# Altium PCB Back.PcbDoc
Units mm, origin at the board's own origin, x right, y up, seen from the top; angles counter-clockwise.
Board outline 49.6 x 20 mm, 2 copper layers (Top Layer, Bottom Layer), stack 1.57 mm thick; 29 components, 15 nets, 90 pads, 147 vias.
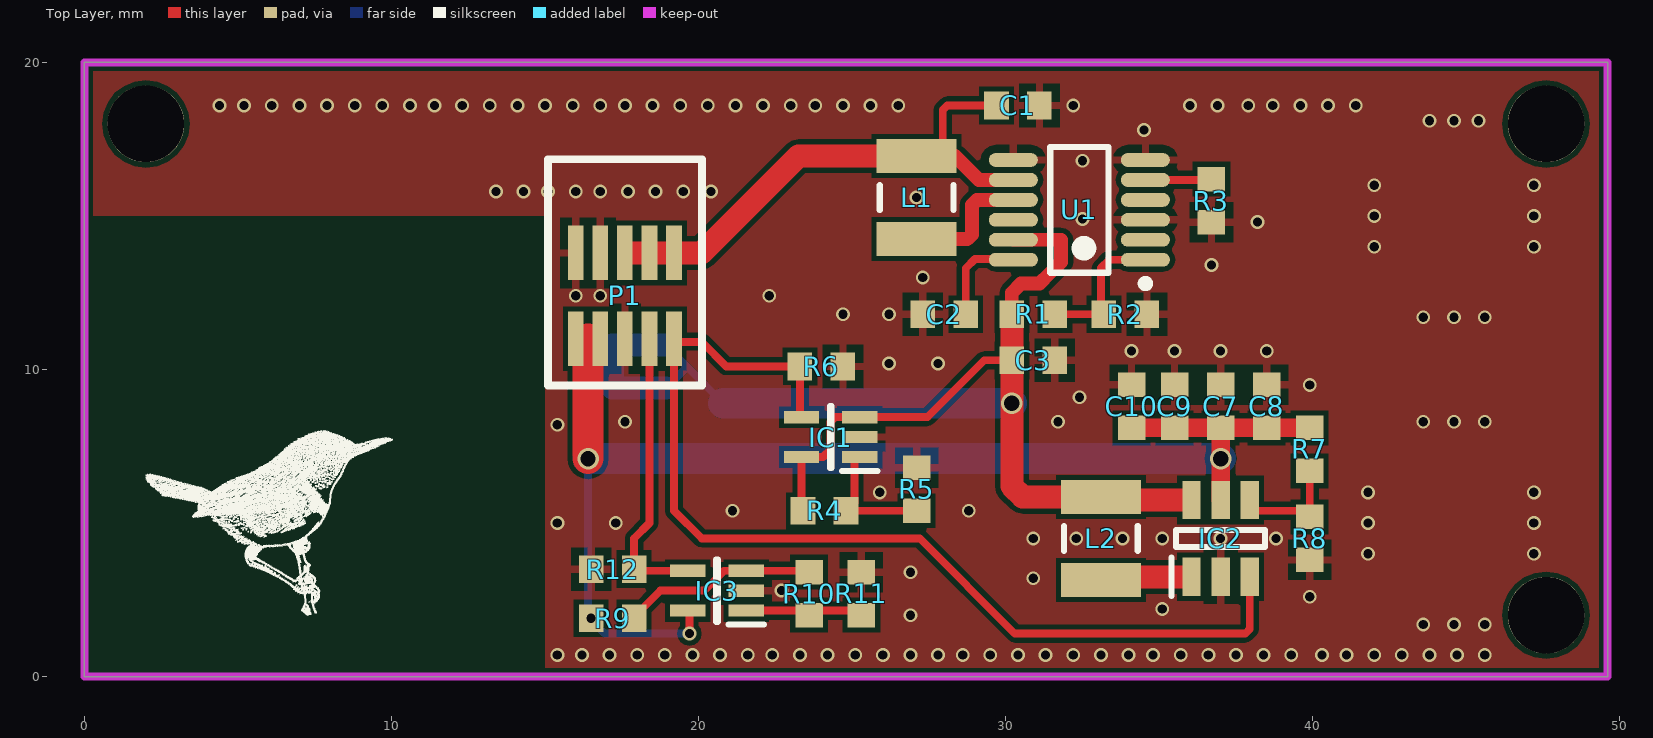
[diagram p0: Top Layer view]
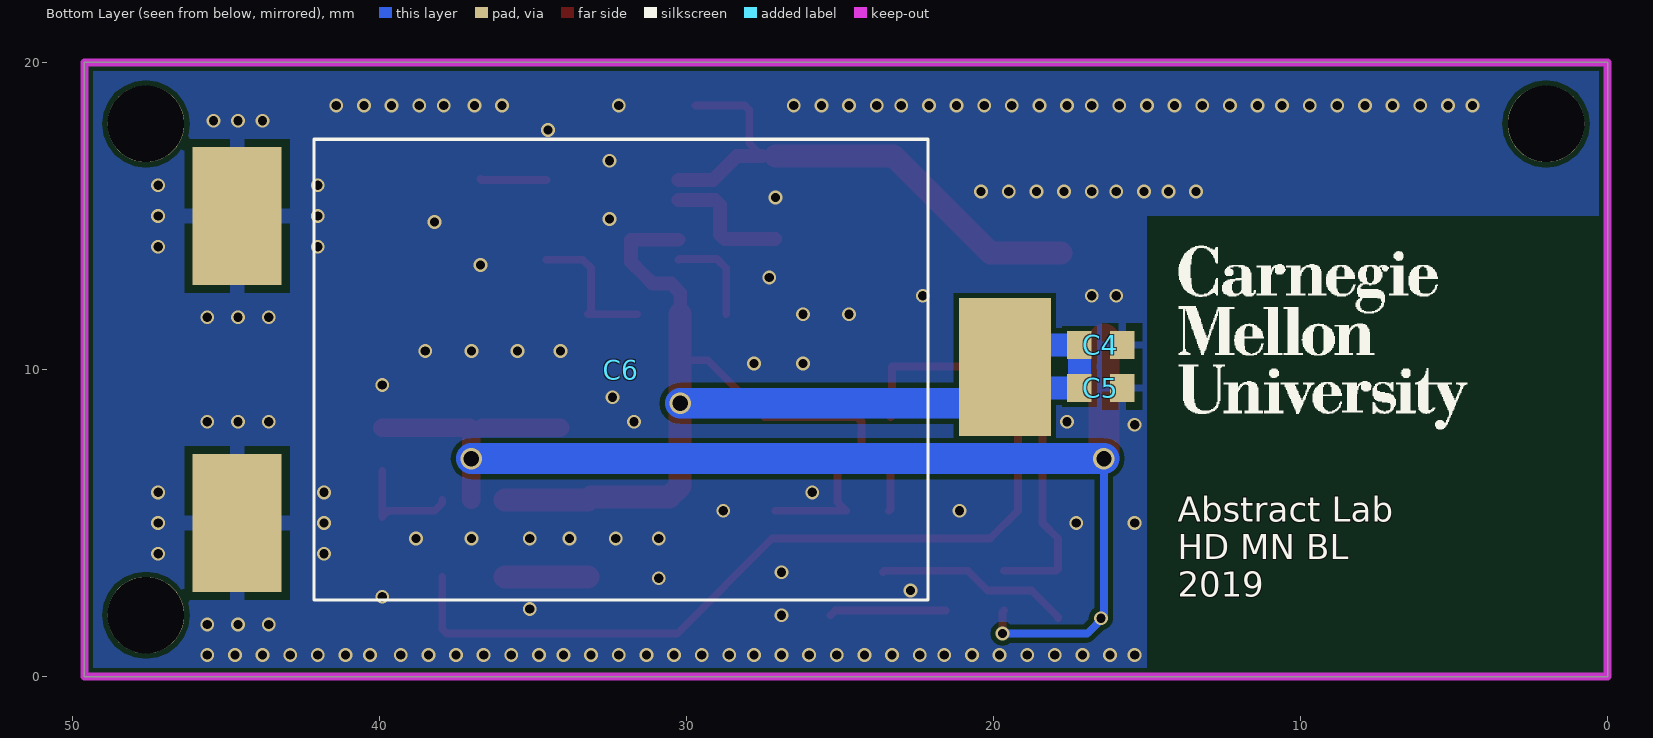
[diagram p1: Bottom Layer view, seen from below]

## Layer stack, top to bottom
Top Solder: solder mask 0.0102, Solder Resist, Dk 3.5
Top Layer: signal copper 0.035
Dielectric 1: dielectric 1.5, FR-4, Dk 3.9
Bottom Layer: signal copper 0.035
Bottom Solder: solder mask 0.0102, Solder Resist, Dk 3.5

## Board outline
0,0 49.6,0 49.6,20 0,20

## Design rules (kind name [scope] priority, off if disabled: settings)
Clearance [All] p1: gap=0.16 ignorepadtopadclearanceinfootprint=FALSE
MinimumSolderMaskSliver [All] p1: minsoldermaskwidth=0.16
PlaneClearance [All] p1: clearance=0.254
PlaneConnect [All] p1: pad.planeconnectstyle=Relief pad.reliefexpansion=0.508 pad.reliefentries=4 pad.reliefconductorwidth=0.254 pad.reliefairgap=0.254 via.planeconnectstyle=Direct via.reliefexpansion=0.508 via.reliefentries=4 via.reliefconductorwidth=0.254 via.reliefairgap=0.254
PolygonConnect [All] p1: thpad.connectstyle=Relief thpad.reliefconductorwidth=0.254 thpad.reliefentries=4 thpad.polygonreliefangle="90 Angle" thpad.airgapwidth=0.254 smdpad.connectstyle=Relief smdpad.reliefconductorwidth=0.254 smdpad.reliefentries=4 smdpad.polygonreliefangle="90 Angle" smdpad.airgapwidth=0.254 via.connectstyle=Direct via.reliefconductorwidth=0.254 via.reliefentries=4 via.polygonreliefangle="90 Angle" via.airgapwidth=0.254
RoutingVias [All] p1: holewidth=0.3 width=0.45 viastyle="Through Hole" minholewidth=0.3 minwidth=0.45 maxholewidth=6.5 maxwidth=5
SolderMaskExpansion [All] p1: expansion=0.102
Width CAM [InNet('Cam*') or InNet('AGND') or InNet('DVDD') or InNet('SCL')or InNet('SDA')] p1: maxlimit=1 minlimit=0.17 preferedwidth=0.2
Width MatchedLine [InNet('ANT') OR InNet('NetANT1_1')] p2: maxlimit=2 minlimit=0.254 preferedwidth=0.99
Width [All] p3: maxlimit=5 minlimit=0.16 preferedwidth=0.254
27 further rules are at their usual default settings.

## Components (designator, comment, footprint, x,y, rotation, side; value= is the part's Value field where it differs from the comment)
C1 "Cap" 1608[0603] 30.4,18.6 r180 top value=10uF
C2 "Cap" 1608[0603] 28,11.8 r0 top value=1uF
C3 "Cap" 1608[0603] 30.9,10.3 r180 top value=10uF
C4 "Cap" 1608[0603] 16.5,10.8 r0 bottom value=0.1uF
C5 "Cap" 1608[0603] 16.5,9.4 r0 bottom value=1uF
C6 "BZ055A333ZSB" BZ054B223ZSB 32.1,10 r180 bottom
C7 "Cap" 1608[0603] 37,8.8 r270 top value=0.1uF
C8 "Cap" 1608[0603] 38.5,8.8 r270 top value=1uF
C9 "Cap" 1608[0603] 35.5,8.8 r270 top value=10uF
C10 "Cap" 1608[0603] 34.1,8.8 r270 top value=10uF
IC1 "MIC841HYC5-TR" SOT65P210X110-5N 24.3,7.8 r180 top
IC2 "TPS61070DDCR" SOT95P280X110-6N 37,4.5 r90 top
IC3 "MIC841HYC5-TR" SOT65P210X110-5N 20.6,2.8 r180 top
L1 "Inductor" C1210 27.1,15.6 r270 top value=10uH
L2 "Inductor" C1210 33.1,4.5 r90 top value=4.7uH
P1 "Header 5X2" FTE-105-03-X-DH 17.6,12.4 r180 top locked
R1 "Res3" 1608[0603] 30.9,11.8 r180 top value=2M
R2 "Res3" 1608[0603] 33.9,11.8 r180 top value=1M
R3 "Res3" 1608[0603] 36.7,15.5 r90 top value=150K
R4 "Res3" 1608[0603] 24.1,5.4 r180 top value=1.74M
R5 "Res3" 1608[0603] 27.1,6.1 r270 top value=1.24M
R6 "Res3" 1608[0603] 24,10.1 r180 top value=2M
R7 "Res3" 1608[0603] 39.9,7.4 r90 top value=1.96M
R8 "Res3" 1608[0603] 39.9,4.5 r90 top value=392K
R9 "Res3" 1608[0603] 17.2,1.9 r180 top value=1.3M
R10 "Res3" 1608[0603] 23.6,2.7 r90 top value=453k
R11 "Res3" 1608[0603] 25.3,2.7 r270 top value=1.24M
R12 "Res3" 1608[0603] 17.2,3.5 r0 top value=2M
U1 "LTC3105EMS#PBF" LT-MS-12_N 32.4,15.2 r180 top

## Footprints (in the part's own frame and the unit in brackets; to place one, negate y for a bottom-side part, rotate by r counter-clockwise, add the part's x,y. Pads: shape width x height; smd on the part's side, far side on the other; paste and mask are expansions set on the pad)
1608[0603] [mm] "Chip Capacitor, Body 1.6x0.8mm, IPC High Density"
  rect 0.8x0.9 smd: 1(-0.7,0) 2(0.7,0)
  body extent -0.87,-0.48 0.87,0.48, height 1.3
BZ054B223ZSB [mm]
  rect 2.9x4.5 smd: 1(-12.525,-5) 2(-12.525,5)
  rect 3x4.5 smd: 3(12.475,0.08)
  silkscreen extent -10.02,-7.5 9.97,7.5, body extent -12.5,-7.5 13.5,7.5, height 3.01
C1210 [mm] "Chip Capacitor, Body 3.2x2.5mm, IPC High Density"
  rect 1.1x2.6 smd: 1(-1.35,0) 2(1.35,0)
  silkscreen extent -0.4,-1.2 0.4,1.2, body extent -1.7,-1.35 1.7,1.35, height 1.3
FTE-105-03-X-DH [mil]
  rect 20x70 smd mask+2: 1(-63,-55) 2(-63,55) 3(-31.5,-55) 4(-31.5,55) 5(0,-55) 6(0,55) 7(31.5,-55) 8(31.5,55) 9(63,-55) 10(63,55)
  silkscreen extent -99,-175 99,115, body extent -79,-300 79,75, height 120
LT-MS-12_N [mm] "SOP, 12-Leads, Body 4.1x3.1mm, Pitch 0.65mm, IPC Medium Density"
  oval 1.6x0.45 smd: 1(-2.15,1.625) 2(-2.15,0.975) 3(-2.15,0.325) 4(-2.15,-0.325) 5(-2.15,-0.975) 6(-2.15,-1.625) 7(2.15,-1.625) 8(2.15,-0.975) 9(2.15,-0.325) 10(2.15,0.325) 11(2.15,0.975) 12(2.15,1.625)
  silkscreen extent -2.28,-2.05 0.95,2.52, body extent -1.55,-2.05 1.55,2.05, height 1.1
SOT65P210X110-5N [mm]
  rect 1.15x0.4 smd: 1(-0.95,0.65) 2(-0.95,0) 3(-0.95,-0.65) 4(0.95,-0.65) 5(0.95,0.65)
  silkscreen extent -1.53,-1.01 0.03,1.1, body extent -1.05,-1.01 1.05,1.01, height 1.1
SOT95P280X110-6N [mm]
  rect 1.25x0.6 smd: 1(-1.25,0.95) 2(-1.25,0) 3(-1.25,-0.95) 4(1.25,-0.95) 5(1.25,0) 6(1.25,0.95)
  silkscreen extent -1.88,-1.45 0.28,1.6, body extent -1.4,-1.45 1.4,1.45, height 1.1

## Part data
C1 C2 C3 C4 C5 C7 C8 C9 C10: "CAP CER 6.3V X5R/X7R 0603", PackageDescription="Chip Capacitor, Body 1.6x0.8mm, IPC High Density", PackageReference=0603, Publisher="Altium Limited"
C6: library part BZ054B223ZSB, "Capacitor", Manufacturer_Name=AVX, Mouser Part Number=581-BZ054B223ZSB, Datasheet Link=http://datasheets.avx.com/BestCap.pdf, Height=6mm, Manufacturer_Part_Number=BZ054B223ZSB, Mouser Price/Stock=https://www.mouser.com/Search/Refine.aspx?Keyword=581-BZ054B223ZSB
IC1 IC3: "Comparator with 1.25% Reference and Adjustable Hysteresis", Manufacturer_Name=Microchip, Mouser Part Number=998-MIC841HYC5TR, RS Part Number=1654292, ComponentLink2Description="Package Specification", ComponentLink2URL=http://94.251.15.129/chip/ChipDoc.nsf/Package/4907A36056EE3CAB47257B96006A2837!OpenDocument, Datasheet Link=http://ww1.microchip.com/downloads/en/devicedoc/20005758a.pdf, Height=1.1mm, Manufacturer_Part_Number=MIC841HYC5-TR, RS Price/Stock=http://uk.rs-online.com/web/p/products/1654292
  IC1: ComponentLink1Description=Datasheet, ComponentLink1URL=http://ww1.microchip.com/downloads/en/devicedoc/20005758a.pdf, ComponentLink3Description="Manufacturer URL", ComponentLink3URL=https://www.microchip.com
  IC3: ComponentLink1Description="Manufacturer URL", ComponentLink1URL=https://www.microchip.com, ComponentLink3Description=Datasheet, ComponentLink3URL=http://ww1.microchip.com/downloads/en/devicedoc/20005758a.pdf
IC2: "90% Efficient Synchronous Boost Converter With 600-mA Switch", Manufacturer_Name="Texas Instruments", Mouser Part Number=595-TPS61070DDCR, ComponentLink1Description="Manufacturer URL", ComponentLink1URL=www.ti.com, ComponentLink2Description="Package Specification", ComponentLink2URL=http://www.ti.com/lit/ml/mpds026l/mpds026l.pdf, ComponentLink3Description=Datasheet, ComponentLink3URL=http://www.ti.com/lit/ds/symlink/tps61070.pdf, Datasheet Link=http://www.ti.com/lit/ds/symlink/tps61070.pdf, Height=1.1mm, Manufacturer_Part_Number=TPS61070DDCR, Mouser Price/Stock=https://www.mouser.com/Search/Refine.aspx?Keyword=595-TPS61070DDCR
P1: "Header, 5-Pin, Dual row", LatestRevisionDate=17-Jul-2002, LatestRevisionNote="Re-released for DXP Platform.", Publisher="Altium Limited"
R1 R2 R3 R4 R5 R6 R7 R8 R9 R10 R11 R12: "RES 1/10W 1% 0603 SMD", PackageDescription="Chip Resistor, Body 1.6x0.8mm, IPC High Density", PackageReference=0603, Publisher="Altium Limited"
U1: library part CMP-0473-00104-1, "400 mA Step-Up DC/DC Converter with Maximum Power Point Control and 250 mV Start-Up, 12-pin SOP (MS-12), -40 to 85 degC, Pb-Free", Manufacturer="Linear Technology", ComponentLink1Description="Manufacturer URL", ComponentLink1URL=http://www.linear.com/, ComponentLink2Description=Datasheet, ComponentLink2URL=https://www.analog.com/media/en/technical-documentation/data-sheets/3105fb.pdf, ComponentLink3Description="Package Specification", ComponentLink3URL=http://cds.linear.com/docs/en/packaging/05081668_A_MS12.pdf, DatasheetVersion="Rev. A", Energy Source=Solar, Mounting Technology="Surface Mount", Number of Outputs=1, PackageDescription="12-Pin Plastic MSOP, Body 4.039 x 3 mm, Pitch 0.65 mm", PackageReference=MS-12, PackageVersion="Rev. A, 05/2013", PartNumber=LTC3105EMS#PBF, RoHS=TRUE, Topology=Boost, Vin Max(V)=5, Vin Min(V)=0.225, Vout Max(V)=5.25
L1: Code_IEC=3225, Code_JEITA=1210, LatestRevisionDate=29-May-2009, LatestRevisionNote="IPC-7351 Footprint Added.", PackageDescription="Chip Inductor", PackageReference=1210, Part=CBC3225T100KR, Published=8-Jun-2000, Publisher="Altium Limited"
L2: Code_IEC=3225, Code_JEITA=1210, LatestRevisionDate=29-May-2009, LatestRevisionNote="IPC-7351 Footprint Added.", PackageDescription="Chip Inductor", PackageReference=1210, Part=CBC3225T4R7MR, Published=8-Jun-2000, Publisher="Altium Limited"

## Free pads (board coordinates)
  round 2.5 hole 2.5 unplated: 1(2,18) 2(47.6,18) 3(47.6,2)

## Via types
v1: diameter 0.45, hole 0.3, Top Layer to Bottom Layer, tented both sides, 144 vias
v2: diameter 0.7, hole 0.5, Top Layer to Bottom Layer, tented both sides, 3 vias

## Nets (pads, with @x,y where several pads share a name; then routed paths per layer and width w, separated by ;. In a path a pad name is that pad's centre, name@x,y a point inside that pad or via, vN(x,y) a via of type N, cw(c..) or ccw(c..) an arc to the next point about the centre after c; other vN are vias at no path point)
GND: C1.1 C2.1 C3.1 C4.1 C5.1 C6.1 C6.2 C7.1 C8.1 C9.1 C10.1 IC1.2 IC2.2 IC3.2 P1.6 P1.7 P1.9 R2.1 R3.1 R5.1 R6.1 R8.1 R11.1 R12.1 U1.3 U1.6 U1.7
  other v1: 15.4,0.7 16.2,0.7 17.1,0.7 18,0.7 18.9,0.7 19.8,0.7 20.7,0.7 21.6,0.7 22.4,0.7 23.3,0.7 24.2,0.7 25.1,0.7 26,0.7 26.9,0.7 27.8,0.7 28.6,0.7 29.5,0.7 30.4,0.7 31.3,0.7 32.2,0.7 33.1,0.7 34,0.7 34.8,0.7 35.7,0.7 36.6,0.7 37.5,0.7 38.4,0.7 39.3,0.7 40.3,0.7 41.1,0.7 42,0.7 42.9,0.7 43.8,0.7 44.7,0.7 45.6,0.7 43.6,1.7 44.6,1.7 45.6,1.7 26.9,2 35.1,2.2 39.9,2.6 22.7,2.8 30.9,3.2 26.9,3.4 41.8,4 47.2,4 30.9,4.5 32.3,4.5 33.8,4.5 35.1,4.5 37,4.5 38.8,4.5 15.4,5 17.3,5 41.8,5 47.2,5 21.1,5.4 28.8,5.4 25.9,6 41.8,6 47.2,6 15.4,8.2 17.6,8.3 31.7,8.3 43.6,8.3 44.6,8.3 45.6,8.3 32.4,9.1 39.9,9.5 26.2,10.2 27.8,10.2 34.1,10.6 35.5,10.6 37,10.6 38.5,10.6 43.6,11.7 44.6,11.7 45.6,11.7 24.7,11.8 26.2,11.8 16,12.4 16.8,12.4 22.3,12.4 27.3,13 36.7,13.4 42,14 47.2,14 38.2,14.8 32.5,14.9 42,15 47.2,15 27.1,15.6 13.4,15.8 14.3,15.8 15.1,15.8 16,15.8 16.8,15.8 17.7,15.8 18.6,15.8 19.5,15.8 20.4,15.8 42,16 47.2,16 32.5,16.8 34.5,17.8 43.8,18.1 44.6,18.1 45.4,18.1 4.4,18.6 5.2,18.6 6.1,18.6 7,18.6 7.9,18.6 8.8,18.6 9.7,18.6 10.6,18.6 11.4,18.6 12.3,18.6 13.2,18.6 14.1,18.6 15,18.6 15.9,18.6 16.8,18.6 17.6,18.6 18.5,18.6 19.4,18.6 20.3,18.6 21.2,18.6 22.1,18.6 23,18.6 23.8,18.6 24.7,18.6 25.6,18.6 26.5,18.6 32.2,18.6 36,18.6 36.9,18.6 37.9,18.6 38.7,18.6 39.6,18.6 40.5,18.6 41.4,18.6
HTH: IC3.1 R10.1 R11.2 | length 3.8
  Top Layer w0.254: IC3.1 25.15,2.15 R11.2
LTH: IC3.3 R9.1 R10.2 | length 6.4
  Top Layer w0.254: R9.1 17.9,1.95 18.75,2.8 20.181,2.8 20.831,3.45 IC3.3 23.55,3.45 R10.2
MSP_RST: IC3.4 P1.4 R12.2 | length 9.5
  Top Layer w0.254: P1.4 18.4,5 17.9,4.5 R12.2 17.95,3.45 IC3.4
NetC2_2: C2.2 U1.12 | length 3.2
  Top Layer w0.254: C2.2 28.7,13.3 29,13.6 30.225,13.6 U1.12
NetIC1_1: IC1.1 R4.1 R5.2 | length 4.3
  Top Layer w0.254: IC1.1 25.146,7.15 25.073,7.077 25.073,5.673 R4.1 R5.2
NetIC2_1: IC2.1 L2.1 | length 2.8
  Top Layer w0.254: L2.1 L2.1@33.2,3.25
  Top Layer w0.75: L2.1@33.2,3.25 IC2.1@35.9,3.25
NetIC2_4: IC2.4 R7.1 R8.2 | length 3.7
  Top Layer w0.254: IC2.4 37.95,5.646 38.196,5.4 39.7,5.4 R8.2 R7.1
NetL1_2: L1.2 U1.9 | length 4.2
  Top Layer w0.254: L1.2 L1.2@27.101,14.251
  Top Layer w0.45: L1.2@27.101,14.251 28.751,14.251 28.9,14.4 28.9,15.356 29.069,15.525 U1.9
NetR1_1: R1.1 R2.2 U1.1 | length 4.7
  Top Layer w0.254: R1.1 R2.2 33.1,11.9 33.1,13.306 33.369,13.575 U1.1
NetR3_2: R3.2 U1.5 | length 2.2
  Top Layer w0.254: U1.5 36.675,16.175 R3.2
TPS_EN: IC1.4 IC2.3 P1.2 R6.2 | length 33.9
  Top Layer w0.254: IC1.4 23.3,8.5 R6.2 20.9,10.1 20.1,10.9 19.303,10.9 P1.2 19.2,5.4 20.1,4.5 27.2,4.5 30.3,1.4 37.801,1.4 37.95,1.549 IC2.3
V_HARVEST: C1.2 L1.1 P1.1 P1.3 P1.5 U1.8 | length 17.6
  Top Layer w0.254: L1.1 27.528,16.95 27.951,17.373 27.951,18.451 28.1,18.6 C1.2
  Top Layer w0.45: L1.1@27.528,16.95 28.35,16.95 29.125,16.175 U1.8
  Top Layer w0.75: P1.5@17.8,13.8 P1.3 P1.1 20.097,13.797 23.25,16.95 L1.1
VCAP: C3.2 C4.2 C5.2 C6.3 IC1.3 IC1.5 IC2.6 L2.2 R1.2 R4.2 U1.11 | length 44.8
  Top Layer w0.254: R4.2 23.35,5.45 IC1.5 24.05,7.15 24.3,7.4 24.3,8.3 24.45,8.45 IC1.3 27.45,8.45 29.3,10.3 C3.2 ; L2.2 L2.2@33.2,5.75
  Top Layer w0.45: R1.2 30.2,12.5 30.5,12.8 31.1,12.8 31.435,13.135 31.8,13.5 31.8,14.225 U1.11
  Top Layer w0.75: R1.2 C3.2 v2(30.2,8.9) 30.2,6.2 30.55,5.85 L2.2 ; L2.2@33.2,5.75 IC2.6@35.9,5.75
  Bottom Layer w0.254: C6.3@18.905,10.8 C6.3 ; C6.3@18.945,9.4 C6.3 ; C6.3@20.805,8.9 C6.3
  Bottom Layer w0.75: C6.3@18.905,10.8 C4.2 C5.2 C6.3@18.945,9.4
  Bottom Layer w1: C6.3@20.805,8.9 v2(30.2,8.9)
VCC: C7.2 C8.2 C9.2 C10.2 IC2.5 IC3.5 P1.8 P1.10 R7.2 R9.2 | length 42.2
  Top Layer w0.254: IC3.5 19.7,2.1 v1(19.7,1.4) ; C7.2@37,7.75 36.65,8.1 C7.2
  Top Layer w0.6: C10.2 C9.2 C7.2@36.65,8.1 ; IC2.5 v2(37,7.1) C7.2@37,7.75 ; C7.2@37.05,8.1 R7.2
  Top Layer w1: v2(16.4,7.1) 16.4,11.003
  Bottom Layer w0.254: v2(16.4,7.1) 16.4,1.949 16.949,1.4 v1(19.7,1.4)
  Bottom Layer w1: v2(16.4,7.1) v2(37,7.1)
  other v1: 16.5,1.9
pads on no net: U1.2 U1.4 U1.10

## Polygon pours and split planes (outlines as drawn)
GND on Top Layer "Top Layer-GND" (solid, pour order 16): 0,15 0,20 49.6,20 49.6,0 15,0 15,15
no net on Top Layer "Top Layer-No Net" (solid, pour order 14): 5,11.9
no net on Top Layer "Top Layer-No Net 1" (solid, pour order 12): 0.8,13.1
no net on Top Layer "Top Layer-No Net 3" (solid, pour order 8): 5,1.7
no net on Top Layer "Top Layer-No Net 4" (solid, pour order 6): 0.8,10.2
no net on Top Layer "Top Layer-No Net 5" (solid, pour order 4): 0.8,11.4
GND on Bottom Layer "Bottom Layer-GND" (solid, pour order 18): 0,15 0,20 49.6,20 49.6,0 15,0 15,15

## Keep-outs
Keep-Out Layer:
  lines w0.254: 0,0 0,20 8.577,20 26.077,20 49.6,20 49.6,0 0,0

## Other copper
Top Layer:
  pour cut-out: 15,0 15,15 0,15 0,0

## Silkscreen, mask and mechanical layers (free items; w line width, h text height)
Top Overlay:
  drawing of 7095 lines, arcs and shapes, not listed
Bottom Overlay:
  drawing of 1894 lines, arcs and shapes, not listed
  text "Abstract Lab  / HD MN BL  / 2019" at 14,2.6 h0.81

## Text inside footprints (layer, text, board x,y; h text height)
P1: Mechanical 1 "J1" at 18.046,12.857 h0.76 r180